# EAGLE board M7065X (EAGLE 6.6.0)
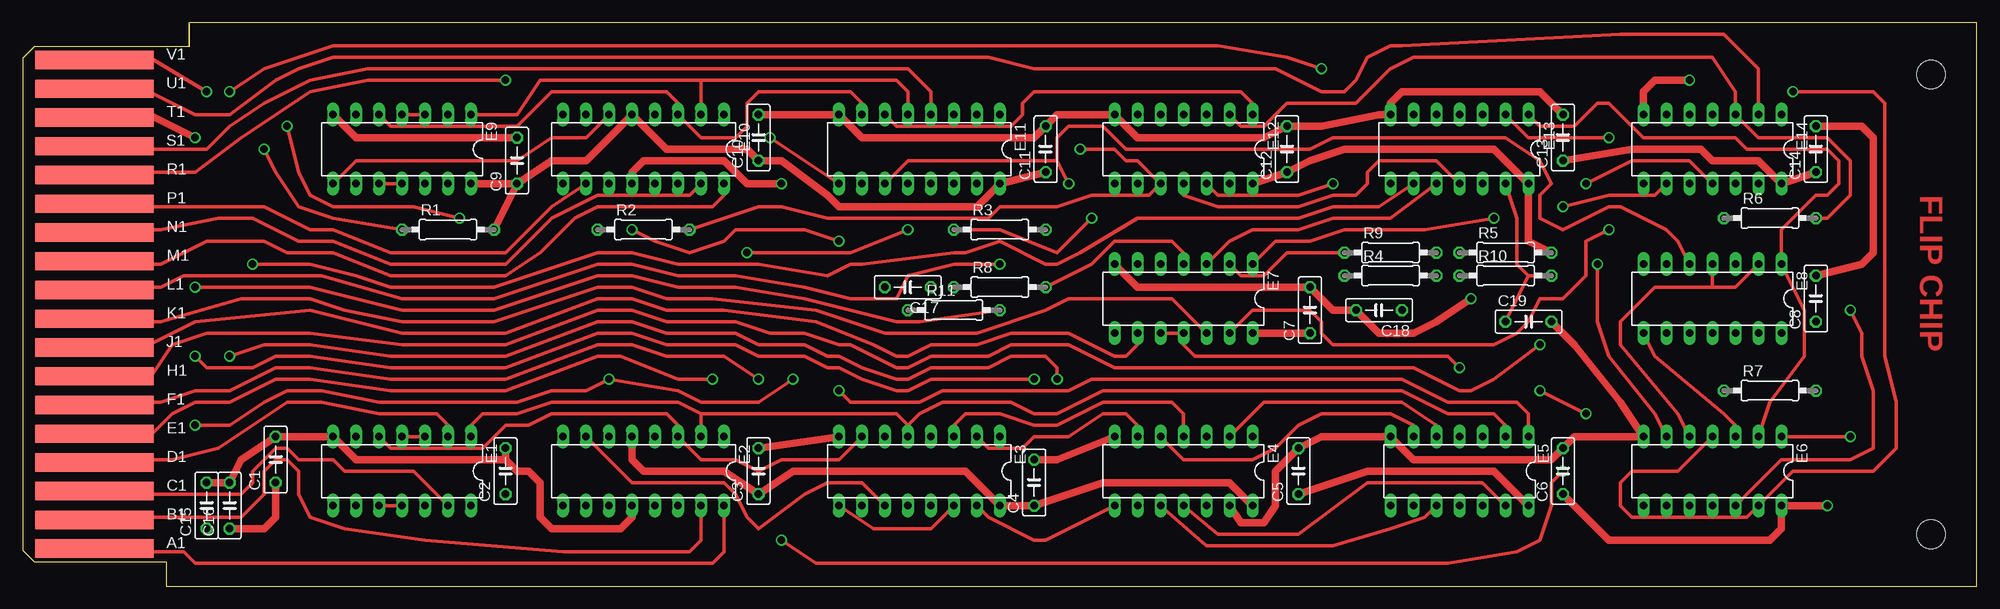
[diagram p0: board, top side]
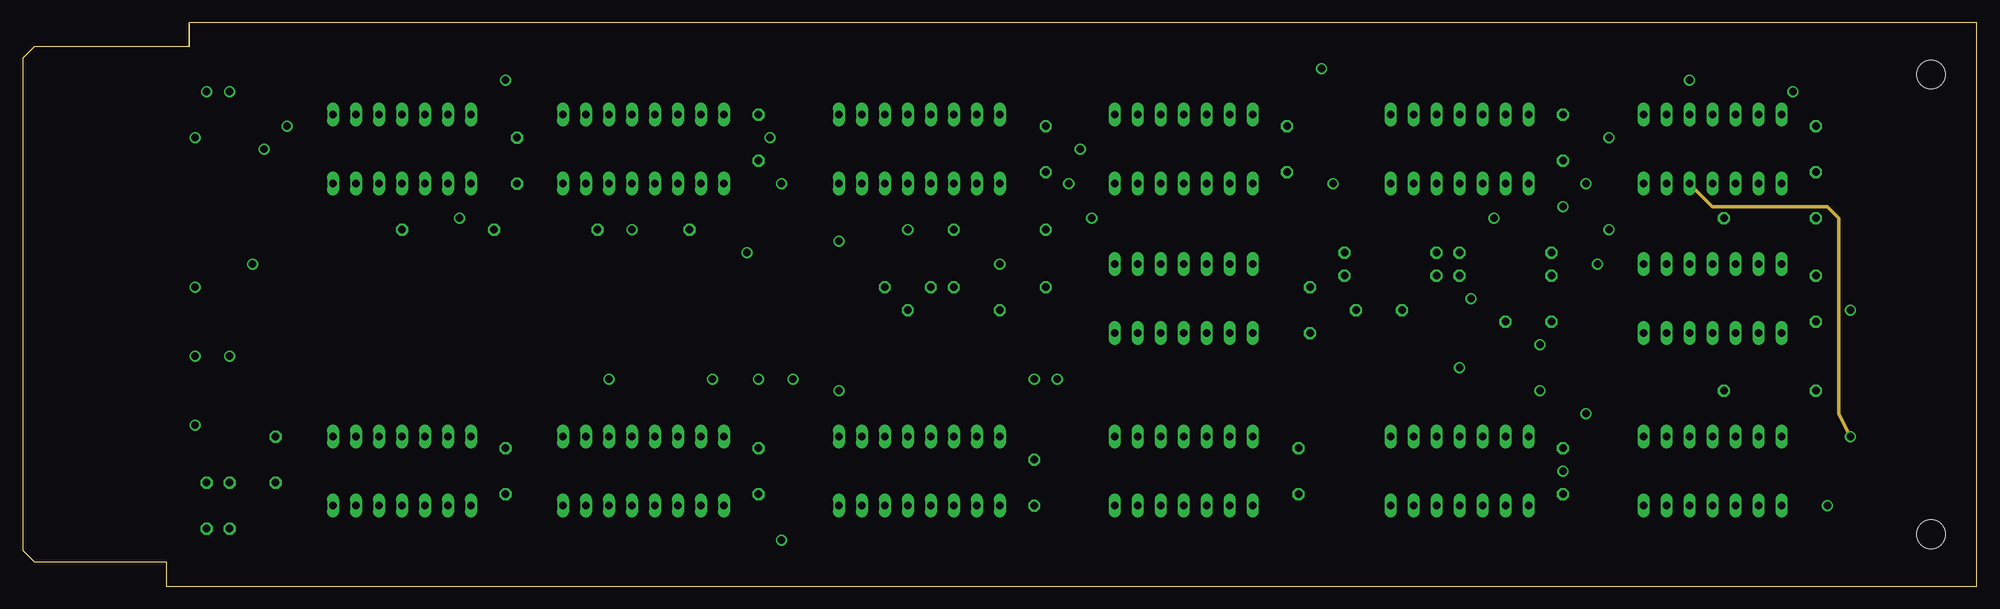
[diagram p1: board, inner layer ECO]
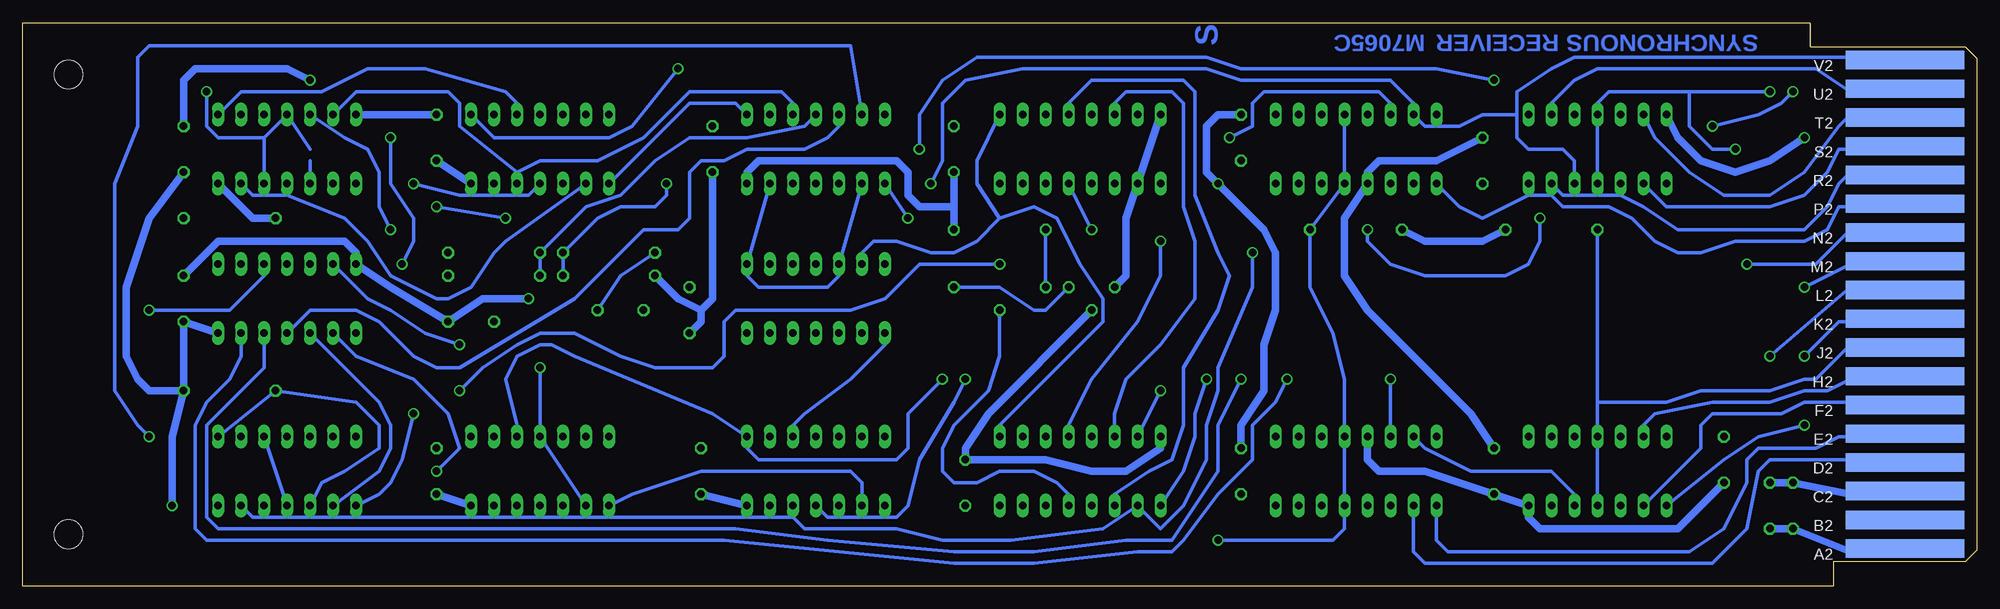
[diagram p2: board, bottom side, seen from below]

Size 215.9 x 62.23 mm. Coordinates in mm from the lower left corner, seen from the top.
Copper layers (1+2+16): Top 0.035mm / dielectric 1.5mm / ECO 0.035mm / dielectric 0.15mm / Bottom 0.035mm
Design rules "16mils *": minimum track width 16mil, minimum drill 32mil, track to track 15mil, track to pad 10mil, pad to pad 10mil, via to via 10mil, smd to smd 10mil, copper to edge 13mil, drill to drill 10mil, minimum pad ring 10mil, minimum via ring 8mil, stop-mask expansion 0mil, vias tented up to drill 0mil, thermal gap 10mil
Net classes: 1 supply: width 0.813 mm

## Footprints (pad centres in the part's own frame; a part is rotated, then mirrored left to right if it is on the bottom)
C050-025X075 = drill 0.813 octagon: 1 -2.54,0; 2 2.54,0
DIL14 = drill 0.813 long: 1 -7.62,-3.81; 2 -5.08,-3.81; 3 -2.54,-3.81; 4 0,-3.81; 5 2.54,-3.81; 6 5.08,-3.81; 7 7.62,-3.81; 8 7.62,3.81; 9 5.08,3.81; 10 2.54,3.81; 11 0,3.81; 12 -2.54,3.81; 13 -5.08,3.81; 14 -7.62,3.81
DIL16 = drill 0.813 long: 1 -8.89,-3.81; 2 -6.35,-3.81; 3 -3.81,-3.81; 4 -1.27,-3.81; 5 1.27,-3.81; 6 3.81,-3.81; 7 6.35,-3.81; 8 8.89,-3.81; 9 8.89,3.81; 10 6.35,3.81; 11 3.81,3.81; 12 1.27,3.81; 13 -1.27,3.81; 14 -3.81,3.81; 15 -6.35,3.81; 16 -8.89,3.81
0207/10 = drill 0.813 octagon: 1 -5.08,0; 2 5.08,0
SINGLE-LONG = hole 3.175: 210.82,56.515; 210.82,5.715
EDGE-CON2 = smd 13.106 x 2.032: A1 7.938,4.128; B1 7.938,7.303; C1 7.938,10.477; D1 7.938,13.652; E1 7.938,16.828; F1 7.938,20.003; H1 7.938,23.177; J1 7.938,26.352; K1 7.938,29.527; L1 7.938,32.703; M1 7.938,35.877; N1 7.938,39.053; P1 7.938,42.227; R1 7.938,45.403; S1 7.938,48.578; T1 7.938,51.752; U1 7.938,54.928; V1 7.938,58.102 | smd 13.106 x 2.032 bottom: A2 7.938,4.128; B2 7.938,7.303; C2 7.938,10.477; D2 7.938,13.652; E2 7.938,16.828; F2 7.938,20.003; H2 7.938,23.177; J2 7.938,26.352; K2 7.938,29.527; L2 7.938,32.703; M2 7.938,35.877; N2 7.938,39.053; P2 7.938,42.227; R2 7.938,45.403; S2 7.938,48.578; T2 7.938,51.752; U2 7.938,54.928; V2 7.938,58.102

## Placement (x,y rotation side)
C1  .01uF  [C050-025X075]  27.94,13.97 90 top
C2  .01uF  [C050-025X075]  53.34,12.7 90 top
C3  .01uF  [C050-025X075]  81.28,12.7 90 top
C4  .01uF  [C050-025X075]  111.76,11.43 90 top
C5  .01uF  [C050-025X075]  140.97,12.7 90 top
C6  .01uF  [C050-025X075]  170.18,12.7 90 top
C7  .01uF  [C050-025X075]  142.24,30.48 90 top
C8  .01uF  [C050-025X075]  198.12,31.75 90 top
C9  .01uF  [C050-025X075]  54.61,46.99 90 top
C10  .01uF  [C050-025X075]  81.28,49.53 90 top
C11  .01uF  [C050-025X075]  113.03,48.26 90 top
C12  .01uF  [C050-025X075]  139.7,48.26 90 top
C13  .01uF  [C050-025X075]  170.18,49.53 90 top
C14  .01uF  [C050-025X075]  198.12,48.26 90 top
C15  .01uF  [C050-025X075]  20.32,8.89 90 top
C16  .01uF  [C050-025X075]  22.86,8.89 90 top
C17  1000pF  [C050-025X075]  97.79,33.02 180 top
C18  1000pF  [C050-025X075]  149.86,30.48 180 top
C19  1000pF  [C050-025X075]  166.37,29.21 0 top
E1  DEC8242  [DIL14]  41.91,12.7 180 top
E2  7475N  [DIL16]  68.58,12.7 180 top
E3  DEC8271  [DIL16]  99.06,12.7 180 top
E4  7404N  [DIL14]  128.27,12.7 180 top
E5  7450N  [DIL14]  158.75,12.7 180 top
E6  7474N  [DIL14]  186.69,12.7 180 top
E7  7400N  [DIL14]  128.27,31.75 180 top
E8  7400N  [DIL14]  186.69,31.75 180 top
E9  DEC8242  [DIL14]  41.91,48.26 180 top
E10  7475N  [DIL16]  68.58,48.26 180 top
E11  DEC8271  [DIL16]  99.06,48.26 180 top
E12  7416N  [DIL14]  128.27,48.26 180 top
E13  7400N  [DIL14]  158.75,48.26 180 top
E14  7474N  [DIL14]  186.69,48.26 180 top
R1  750  [0207/10]  46.99,39.37 0 top
R2  750  [0207/10]  68.58,39.37 0 top
R3  750  [0207/10]  107.95,39.37 0 top
R4  750  [0207/10]  151.13,34.29 0 top
R5  750  [0207/10]  163.83,36.83 0 top
R6  750  [0207/10]  193.04,40.64 0 top
R7  750  [0207/10]  193.04,21.59 0 top
R8  220  [0207/10]  107.95,33.02 0 top
R9  220  [0207/10]  151.13,36.83 0 top
R10  220  [0207/10]  163.83,34.29 0 top
R11  330  [0207/10]  102.87,30.48 0 top
U$1  OUTLINE-SINGLE-LONG  [SINGLE-LONG]  0,0 0 top
U$2  [EDGE-CON2]  0,0 0 top

## Library data of the parts
C1-C19 R1-R11 = rcl
E1 E2 E4 E6-E10 E12-E14 = 74xx-us
E3 E5 E11 U$1 U$2 = dec-con

## Nets
A1: E2.16 U$2.A1
B1: E2.15 U$2.B1
C1: E1.13 U$2.C1
D1: E1.2 U$2.D1
D2: E2.10 U$2.D2
E1: E8.13 U$2.E1
E2: E2.9 U$2.E2
F1: E8.12 U$2.F1
F2: E1.9 U$2.F2
GND [supply]: C1.2 C2.2 C3.2 C4.2 C5.2 C6.2 C7.2 C8.2 C9.2 C10.2 C11.2 C12.2 C13.2 C14.2 C15.2 C16.2 C17.2 C18.2 C19.2 E1.7 E2.12 E3.8 E4.7 E4.13 E5.7 E6.7 E7.7 E8.7 E9.7 E10.12 E11.8 E11.10 E12.7 E13.7 E14.7 R11.1 U$2.C2 U$2.T1
H1: E8.6 U$2.H1
H2: E1.6 U$2.H2
J1: E7.9 U$2.J1
J2: E1.3 E1.4 E1.10 E1.11 E6.2 E8.1 E9.3 E9.4 E9.10 E9.11 E13.1 R1.1 U$2.J2
K1: E7.12 U$2.K1
K2: E4.11 E5.13 U$2.K2
L1: E6.8 U$2.L1
L2: E4.1 E5.3 U$2.L2
M1: E10.16 U$2.M1
M2: E3.13 R11.2 U$2.M2
N1: E10.15 U$2.N1
N2: E13.9 E14.13 U$2.N2
N$1: E1.8 E2.6 E3.9 E3.14
N$2: E1.1 E2.2 E3.5 E5.2
N$3: E1.5 E2.3 E3.7 E5.1
N$4: E3.10 E4.12 E6.4 E6.13 E11.13 E14.4 E14.12
N$5: E6.1 E6.10 E12.6 E14.10 R7.1
N$15: C17.1 E7.4 R8.2
N$16: E7.13 E14.5
N$18: C18.1 E7.2 R9.1
N$19: E7.1 E7.5 E12.9 E12.13 E14.9
N$21: E4.3 E7.8
N$22: E7.3 E13.10
N$23: E3.1 E7.6 E11.1
N$24: E5.4 E5.9 E7.10 E7.11
N$27: E6.5 E8.2 E8.4
N$29: E6.9 E8.10
N$33: E6.3 E6.11 E8.8
N$34: E6.12 E8.3
N$36: E8.11 E12.5
N$37: E9.8 E10.6 E11.9
N$38: E9.1 E10.2 E11.5
N$49: E4.9 E5.8
N$51: E4.5 E5.6
N$52: E3.15 E4.8
N$56: E4.2 E5.5
N$58: E4.10 E5.10
N$60: E3.3 E4.4
N$64: E3.2 E4.6
N$71: E12.11 E13.11 E14.11
N$72: E12.3 E13.12 E14.6
N$76: E3.6 E11.6 E12.1 E13.8
N$77: E12.4 R5.1 R10.1
N$78: E12.12 R4.2 R9.2
N$79: E12.8 R3.1 R8.1
N$80: E12.2 E14.3 R6.2
N$88: E6.6 E13.2
N$90: C19.1 E13.13 R10.2
N$92: E13.3 E14.1
N$120: E9.5 E10.3 E11.7
P1: E10.10 U$2.P1
P2: E10.9 U$2.P2
R1: E2.4 E2.13 E8.9 E10.4 E10.13 E12.10 R2.2 U$2.R1
R2: E9.13 U$2.R2
S1: E1.12 E2.7 E3.11 E11.4 U$2.S1
S2: E9.9 U$2.S2
T2: E9.6 U$2.T2
U1: E14.2 U$2.U1
U2: E9.2 U$2.U2
V1: E3.4 U$2.V1
V2: E8.5 E9.12 E10.7 E11.11 U$2.V2
VCC [supply]: C1.1 C2.1 C3.1 C4.1 C5.1 C6.1 C7.1 C8.1 C9.1 C10.1 C11.1 C12.1 C13.1 C14.1 C15.1 C16.1 E1.14 E2.5 E3.16 E4.14 E5.14 E6.14 E7.14 E8.14 E9.14 E10.5 E11.16 E12.14 E13.14 E14.14 R1.2 R2.1 R3.2 R4.1 R5.2 R6.1 R7.2 U$2.A2

## Tracks (layer width: path | path; a pad name or v marks a point on that pad's centre or on a via)
A1
  Top 0.406: U$2.A1 8.89,3.81 17.78,3.81 19.05,2.54 76.2,2.54 77.47,3.81 E2.16
B1
  Top 0.406: U$2.B1 8.89,7.62 24.13,7.62 26.67,10.16 26.67,12.7 27.94,13.97 29.21,13.97 30.48,12.7 30.48,10.16 31.75,7.62 35.56,6.35 44.45,5.08 59.69,3.81 73.66,3.81 74.93,5.08 E2.15
C1
  Top 0.406: U$2.C1 8.89,10.16 24.13,10.16 25.4,11.43 25.4,12.7 27.94,15.24 29.21,15.24 30.48,13.97 34.29,13.97 35.56,12.7 43.18,12.7 E1.13
D1
  Top 0.406: E1.2 46.99,17.78 45.72,19.05 39.37,19.05 33.02,20.32 29.21,20.32 21.59,15.24 16.51,13.97 8.89,13.97 U$2.D1
D2
  Bottom 0.406: U$2.D2 8.89,13.97 22.86,13.97 24.13,12.7 25.4,6.35 29.21,2.54 60.96,2.54 62.23,3.81 E2.10
E1  (via drill 0.81)
  Top 0.406: v76.2,22.86 72.39,22.86 66.04,25.4 63.5,25.4 53.34,21.59 40.64,21.59 31.75,22.86 27.94,22.86 22.86,20.32 19.05,20.32 16.51,19.05 13.97,16.51 8.89,16.51 U$2.E1
  Bottom 0.406: E8.13 191.77,25.4 193.04,22.86 195.58,20.32 196.85,17.78 196.85,6.35 195.58,5.08 138.43,5.08 113.03,2.54 104.14,2.54 92.71,3.81 88.9,3.81 87.63,5.08 83.82,10.16 80.01,13.97 80.01,17.78 77.47,20.32 v76.2,22.86
E2
  Bottom 0.406: E2.9 59.69,5.08 58.42,3.81 31.75,3.81 27.94,6.35 25.4,11.43 25.4,13.97 24.13,15.24 17.78,15.24 15.24,16.51 8.89,16.51 U$2.E2
F1  (via drill 0.81)
  Top 0.406: v81.28,22.86 77.47,25.4 71.12,25.4 67.31,26.67 63.5,26.67 53.34,22.86 40.64,22.86 31.75,24.13 27.94,24.13 22.86,21.59 19.05,21.59 15.24,20.32 8.89,20.32 U$2.F1
  Bottom 0.406: v81.28,22.86 83.82,17.78 83.82,12.7 88.9,5.08 93.98,5.08 104.14,3.81 113.03,3.81 127,5.08 137.16,6.35 194.31,6.35 195.58,7.62 195.58,17.78 189.23,24.13 E8.12
F2
  Bottom 0.406: E1.9 30.48,15.24 30.48,17.78 29.21,19.05 21.59,19.05 19.05,20.32 8.89,20.32 U$2.F2
GND  (via drill 0.81)
  Top 0.813: C15.2 C16.2 24.13,13.97 C1.2 E1.7 36.83,13.97 53.34,13.97 | E2.12 67.31,7.62 66.04,6.35 58.42,6.35 57.15,7.62 57.15,11.43 55.88,12.7 54.61,12.7 53.34,13.97 | C19.2 171.45,26.67 176.53,20.32 E6.7 171.45,16.51 C6.2 168.91,13.97 153.67,13.97 E5.7 143.51,16.51 C5.2 138.43,12.7 138.43,8.89 137.16,6.99 134.62,6.99 E4.13 | v160.02,31.75 156.21,29.21 153.67,27.94 149.86,27.94 C18.2 144.78,30.48 C7.2 123.19,33.02 E7.7 | C14.2 203.2,50.8 204.47,49.53 204.47,36.83 203.2,35.56 C8.2 | U$2.T1 8.89,52.07 13.97,52.07 v19.05,49.53 | C10.2 E11.8 92.71,49.53 111.76,49.53 C11.2 114.3,52.07 E12.7 123.19,49.53 137.16,49.53 C12.2 143.51,50.8 149.86,52.07 E13.7 151.13,53.34 152.4,54.61 167.64,54.61 C13.2 | E14.7 179.07,54.61 180.34,55.88 v184.15,55.88 | v83.82,44.45 80.01,44.45 77.47,46.99 68.58,46.99 67.31,45.72 E10.12 | E9.7 36.83,49.53 C9.2 | E4.7 114.3,13.97 C4.2 | C3.2 E3.8 | 53.34,13.97 C2.2
  Bottom 0.813: U$2.C2 8.89,10.16 13.97,10.16 C15.2 C16.2 | C2.2 55.88,19.05 67.31,30.48 69.85,34.29 69.85,40.64 E10.12 67.31,45.72 66.04,46.99 59.69,46.99 C9.2 | E9.7 33.02,49.53 30.48,46.99 26.67,45.72 22.86,46.99 v19.05,49.53 | C3.2 81.28,17.78 78.74,21.59 78.74,26.67 77.47,30.48 77.47,36.83 78.74,39.37 v83.82,44.45 85.09,45.72 85.09,50.8 83.82,52.07 C10.2 | E3.8 90.17,15.24 93.98,12.7 97.79,12.7 102.87,13.97 C4.2 111.76,15.24 109.22,19.05 R11.1 | E11.8 E11.10 93.98,40.64 93.98,34.29 C17.2 | C14.2 198.12,55.88 196.85,57.15 186.69,57.15 v184.15,55.88 | C13.2 E14.7 | C8.2 194.31,38.1 180.34,38.1 179.07,36.83 E8.7 175.26,33.02 C19.2 165.1,31.75 v160.02,31.75
H1  (via drill 0.81)
  Top 0.406: v167.64,26.67 162.56,22.86 160.02,21.59 158.75,21.59 153.67,24.13 120.65,24.13 115.57,26.67 109.22,26.67 106.68,25.4 100.33,25.4 97.79,24.13 96.52,24.13 91.44,26.67 90.17,26.67 86.36,27.94 82.55,27.94 78.74,29.21 71.12,29.21 67.31,30.48 63.5,30.48 53.34,26.67 41.91,26.67 31.75,27.94 20.32,27.94 16.51,26.67 13.97,22.86 8.89,22.86 U$2.H1
  Bottom 0.406: E8.6 177.8,31.75 175.26,30.48 171.45,27.94 v167.64,26.67
H2
  Bottom 0.406: E1.6 36.83,17.78 35.56,19.05 29.21,20.32 22.86,20.32 19.05,21.59 16.51,21.59 13.97,22.86 8.89,22.86 U$2.H2
J1
  Top 0.406: E7.9 123.19,26.67 121.92,25.4 120.65,25.4 115.57,27.94 109.22,27.94 105.41,26.67 100.33,26.67 97.79,25.4 96.52,25.4 93.98,26.67 87.63,29.21 77.47,30.48 71.12,30.48 67.31,31.75 63.5,31.75 53.34,27.94 52.07,27.94 41.91,27.94 31.75,30.48 19.05,29.21 13.97,26.67 7.62,26.67 U$2.J1
J2  (via drill 0.81)
  Top 0.406: E1.4 E1.3 | E1.11 E1.10 | v26.67,48.26 27.94,45.72 30.48,41.91 34.29,40.64 R1.1 | v22.86,54.61 26.67,57.15 34.29,59.69 132.08,59.69 139.7,58.42 v143.51,57.15 | E9.11 E9.10 | E9.4 E9.3 | E13.1 167.64,50.8 171.45,50.8 173.99,53.34 175.26,53.34 179.07,49.53 189.23,49.53 190.5,48.26 199.39,48.26 200.66,46.99 200.66,44.45 199.39,43.18 198.12,43.18 194.31,39.37 E8.1 196.85,30.48 196.85,25.4 193.04,20.32 E6.2
  Bottom 0.406: E1.11 E1.4 41.91,20.32 | 41.91,20.32 R1.1 | 41.91,20.32 34.29,20.32 30.48,21.59 22.86,21.59 19.05,22.86 17.78,22.86 13.97,26.67 8.89,26.67 U$2.J2 | E9.11 E9.4 41.91,53.34 40.64,54.61 31.75,54.61 | 31.75,54.61 v22.86,54.61 | 31.75,54.61 31.75,50.8 29.21,48.26 v26.67,48.26 | E13.1 163.83,49.53 151.13,49.53 148.59,50.8 v143.51,57.15
K1
  Top 0.406: U$2.K1 8.89,29.21 15.24,29.21 24.13,31.75 31.75,31.75 35.56,30.48 41.91,29.21 52.07,29.21 63.5,33.02 67.31,33.02 71.12,31.75 76.2,31.75 87.63,30.48 95.25,27.94 105.41,27.94 113.03,30.48 115.57,31.75 127,31.75 E7.12
K2  (via drill 0.81)
  Top 0.406: E4.11 132.08,5.71 140.97,5.71 148.59,11.43 161.29,11.43 E5.13 | v111.76,22.86 100.33,22.86 97.79,21.59 96.52,21.59 92.71,22.86 90.17,24.13 88.9,24.13 86.36,25.4 81.28,25.4 78.74,26.67 71.12,26.67 67.31,27.94 63.5,27.94 53.34,24.13 40.64,24.13 31.75,25.4 27.94,25.4 25.4,24.13 20.32,24.13 v19.05,25.4
  Bottom 0.406: U$2.K2 8.89,29.21 15.24,29.21 v19.05,25.4 | E4.11 127,7.62 119.38,7.62 118.11,8.89 116.84,13.97 113.03,20.32 v111.76,22.86
L1  (via drill 0.81)
  Top 0.406: U$2.L1 8.89,33.02 15.24,33.02 17.78,34.29 33.02,34.29 41.91,31.75 52.07,31.75 63.5,35.56 67.31,35.56 72.39,34.29 78.74,34.29 86.36,33.02 91.44,31.75 96.52,31.75 97.79,34.29 102.87,35.56 v107.95,35.56 | v172.72,19.05 v167.64,21.59
  Bottom 0.406: E6.8 176.53,10.16 175.26,11.43 173.99,13.97 v172.72,19.05 | v167.64,21.59 165.1,24.13 161.29,26.67 158.75,27.94 154.94,27.94 149.86,25.4 146.05,24.13 139.7,24.13 138.43,25.4 138.43,29.21 137.16,30.48 124.46,30.48 120.65,31.75 116.84,35.56 v107.95,35.56
L2  (via drill 0.81)
  Top 0.406: v114.3,22.86 114.3,24.13 113.03,25.4 109.22,25.4 106.68,24.13 100.33,24.13 97.79,22.86 96.52,22.86 92.71,24.13 90.17,25.4 88.9,25.4 86.36,26.67 81.28,26.67 78.74,27.94 71.12,27.94 67.31,29.21 63.5,29.21 53.34,25.4 40.64,25.4 31.75,26.67 26.67,26.67 v22.86,25.4
  Bottom 0.406: U$2.L2 8.89,33.02 13.97,33.02 v22.86,25.4 | v114.3,22.86 118.11,19.05 118.11,15.24 119.38,13.97 134.62,13.97 135.89,15.24 E4.1 139.7,19.05 154.94,25.4 157.48,26.67 158.75,26.67 161.29,25.4 162.56,22.86 161.29,17.78 E5.3
M1
  Top 0.406: E10.16 77.47,43.18 76.2,41.91 63.5,41.91 60.96,40.64 57.15,36.83 53.34,34.29 40.64,34.29 34.29,36.83 29.21,36.83 26.67,38.1 20.32,38.1 15.24,35.56 8.89,35.56 U$2.M1
M2  (via drill 0.81)
  Top 0.406: R11.2 99.06,29.21 96.52,29.21 86.36,31.75 78.74,33.02 72.39,33.02 67.31,34.29 63.5,34.29 52.07,30.48 41.91,30.48 31.75,33.02 v19.05,33.02
  Bottom 0.406: U$2.M2 8.89,35.56 13.97,35.56 v19.05,33.02 | E3.13 100.33,10.16 101.6,11.43 104.14,12.7 107.95,12.7 110.49,11.43 113.03,11.43 114.3,12.7 114.3,15.24 113.03,17.78 109.22,21.59 107.95,25.4 R11.2
N1
  Top 0.406: E10.15 73.66,43.18 63.5,43.18 58.42,40.64 53.34,35.56 40.64,35.56 34.29,38.1 30.48,38.1 25.4,40.64 21.59,40.64 15.24,39.37 8.89,39.37 U$2.N1
N2  (via drill 0.81)
  Top 0.406: v25.4,35.56 31.75,35.56 36.83,34.29 40.64,33.02 52.07,33.02 63.5,36.83 67.31,36.83 72.39,35.56 81.28,35.56 88.9,34.29 91.44,35.56 92.71,35.56 102.87,36.83 104.14,36.83 107.95,38.1 113.03,35.56 114.3,35.56 116.84,36.83 123.19,40.64 140.97,40.64 144.78,41.91 149.86,41.91 E13.9
  Bottom 0.406: U$2.N2 8.89,39.37 13.97,39.37 17.78,35.56 v25.4,35.56 | E14.13 190.5,43.18 186.69,43.18 180.34,40.64 177.8,38.1 175.26,34.29 170.18,31.75 168.91,31.75 166.37,33.02 163.83,36.83 162.56,38.1 E13.9
N$1  (via drill 0.81)
  Top 0.406: E3.9 93.98,6.35 100.33,6.35 E3.14 | v85.09,22.86 81.28,20.32 74.93,20.32 72.39,21.59 v64.77,22.86 62.23,21.59 58.42,21.59 54.61,20.32 39.37,20.32 33.02,21.59 29.21,21.59 26.67,20.32 22.86,17.78 v19.05,17.78
  Bottom 0.406: v19.05,17.78 24.13,16.51 27.94,13.97 E1.8 | E2.6 v64.77,22.86 | E3.9 87.63,12.7 86.36,16.51 86.36,19.05 v85.09,22.86
N$2
  Top 0.406: 74.93,19.05 72.39,20.32 58.42,20.32 54.61,19.05 50.8,19.05 49.53,17.78 E1.1 | 74.93,19.05 E2.2 | 74.93,19.05 96.52,19.05 97.79,17.78 | 97.79,17.78 E3.5 | 97.79,17.78 99.06,19.05 101.6,20.32 109.22,20.32 111.76,19.05 114.3,19.05 119.38,21.59 152.4,21.59 157.48,19.05 162.56,19.05 163.83,17.78 E5.2
N$3  (via drill 0.81)
  Top 0.406: E5.1 166.37,19.05 165.1,20.32 157.48,20.32 152.4,22.86 118.11,22.86 115.57,21.59 101.6,21.59 99.06,20.32 91.44,20.32 v90.17,21.59 | E3.7 90.17,13.97 83.82,13.97 81.28,12.7 78.74,13.97 74.93,13.97 E2.3 72.39,17.78 71.12,19.05 58.42,19.05 55.88,17.78 53.34,17.78 50.8,15.24 40.64,15.24 E1.5
  Bottom 0.406: E3.7 v90.17,21.59
N$4  (via drill 0.81)
  Top 0.406: v195.58,54.61 204.47,54.61 205.74,53.34 205.74,25.4 207.01,20.32 207.01,15.24 204.47,12.7 195.58,12.7 E6.13 190.5,7.62 177.8,7.62 176.53,8.89 176.53,11.43 177.8,12.7 182.88,12.7 E6.4 | v80.01,36.83 91.44,36.83 v97.79,39.37
  Bottom 0.406: 184.15,48.26 E14.4 189.23,49.53 | 189.23,49.53 E14.12 | 189.23,49.53 194.31,49.53 195.58,50.8 v195.58,54.61 | v80.01,36.83 80.01,33.02 83.82,24.13 83.82,21.59 85.09,17.78 85.09,13.97 87.63,8.89 90.17,6.35 E3.10 96.52,6.35 106.68,5.08 114.3,5.08 119.38,6.35 129.54,6.35 130.81,7.62 | 130.81,7.62 E4.12 | 130.81,7.62 190.5,7.62 E6.13 | E11.13 v97.79,39.37
N$5  (via drill 0.81)
  Top 0.406: E6.1 v201.93,16.51
  ECO 0.406: v201.93,16.51 200.66,19.05 200.66,40.64 199.39,41.91 186.69,41.91 E14.10
  Bottom 0.406: v201.93,16.51 203.2,17.78 205.74,21.59 205.74,44.45 203.2,50.8 203.2,58.42 201.93,59.69 124.46,59.69 E12.6 | E6.10 182.88,11.43 180.34,12.7 176.53,15.24 176.53,17.78 179.07,20.32 R7.1 E6.1 | E14.10 184.15,46.99
N$15
  Top 0.406: E7.4 128.27,36.83 127,38.1 120.65,38.1 118.11,35.56 R8.2
  Bottom 0.406: R8.2 107.95,33.02 104.14,30.48 102.87,30.48 C17.1
N$16  (via drill 0.81)
  Top 0.406: v175.26,39.37 172.72,38.1 172.72,34.29 170.18,31.75 167.64,31.75 166.37,29.21 165.1,27.94 162.56,26.67 144.78,26.67 143.51,27.94 143.51,29.21 142.24,30.48 135.89,30.48 E7.13
  Bottom 0.406: E14.5 180.34,49.53 177.8,48.26 176.53,45.72 176.53,41.91 v175.26,39.37
N$18
  Top 0.406: R9.1 139.7,36.83 137.16,34.29 134.62,34.29 E7.2
  Bottom 0.406: R9.1 149.86,34.29 C18.1
N$19  (via drill 0.81)
  Top 0.406: E7.1 138.43,38.1 142.24,38.1 146.05,39.37 154.94,39.37 v162.56,40.64 | v170.18,41.91 175.26,43.18 180.34,43.18 E14.9
  Bottom 0.406: E12.13 E7.1 135.89,34.29 134.62,33.02 127,33.02 125.73,34.29 E7.5 E12.9 | v162.56,40.64 v170.18,41.91
N$21
  Bottom 0.406: E7.8 120.65,26.67 124.46,22.86 129.54,19.05 130.81,17.78 E4.3
N$22
  Top 0.406: E13.10 151.13,40.64 144.78,40.64 140.97,39.37 135.89,39.37 133.35,38.1 E7.3
N$23
  Bottom 0.406: E7.6 123.19,36.83 121.92,38.1 119.38,38.1 115.57,36.83 113.03,36.83 110.49,38.1 107.95,40.64 | E3.1 107.95,17.78 96.52,29.21 96.52,31.75 99.06,35.56 101.6,40.64 104.14,41.91 107.95,40.64 | 107.95,40.64 110.49,44.45 110.49,46.99 E11.1
N$24  (via drill 0.81)
  Top 0.406: v158.75,24.13 157.48,25.4 129.54,25.4 128.27,26.67 E7.11 E7.10
  Bottom 0.406: E5.9 E5.4 v158.75,24.13
N$27
  Top 0.406: E6.5 182.88,19.05 176.53,26.67 176.53,29.21 180.34,33.02 186.69,33.02 | E8.2 189.23,33.02 186.69,33.02 | 186.69,33.02 E8.4
N$29
  Bottom 0.406: E8.10 176.53,20.32 175.26,17.78 175.26,15.24 176.53,12.7 E6.9
N$33
  Top 0.406: E8.8 180.34,25.4 187.96,19.05 189.23,17.78 E6.3
  Bottom 0.406: E6.11 E6.3
N$34  (via drill 0.81)
  Top 0.406: v201.93,30.48 203.2,27.94 203.2,25.4 204.47,21.59 204.47,15.24 201.93,13.97 194.31,13.97 E6.12
  Bottom 0.406: E8.3 189.23,34.29 193.04,30.48 v201.93,30.48
N$36
  Bottom 0.406: E8.11 184.15,30.48 179.07,30.48 176.53,29.21 172.72,25.4 170.18,24.13 167.64,24.13 154.94,31.75 147.32,39.37 143.51,39.37 142.24,40.64 142.24,45.72 140.97,46.99 138.43,46.99 135.89,48.26 129.54,48.26 127,49.53 125.73,50.8 E12.5
N$37  (via drill 0.81)
  Top 0.406: E9.8 36.83,46.99 54.61,46.99 58.42,49.53 62.23,49.53 E10.6 | E11.9 v82.55,49.53
  Bottom 0.406: E10.6 64.77,53.34 66.04,54.61 78.74,54.61 80.01,53.34 80.01,50.8 v82.55,49.53
N$38
  Top 0.406: E11.5 97.79,54.61 96.52,55.88 74.93,55.88 | 74.93,55.88 E10.2 | 74.93,55.88 57.15,55.88 54.61,52.07 E9.1
N$49
  Bottom 0.406: E4.9 123.19,11.43 124.46,12.7 140.97,12.7 148.59,10.16 E5.8
N$51
  Top 0.406: E4.5 128.27,13.97 135.89,13.97 138.43,15.24 140.97,17.78 143.51,19.05 151.13,19.05 153.67,17.78 E5.6
N$52
  Top 0.406: E3.15 106.68,7.62 111.76,5.08 113.03,5.08 E4.8
N$56
  Top 0.406: E5.5 156.21,17.78 152.4,20.32 137.16,20.32 E4.2
N$58
  Top 0.406: E4.10 130.81,4.45 144.78,4.45 151.13,6.35 154.94,7.62 E5.10
N$60
  Top 0.406: E3.3 102.87,17.78 104.14,19.05 107.95,19.05 111.76,17.78 114.3,17.78 119.38,20.32 127,20.32 128.27,19.05 E4.4
N$64
  Top 0.406: E4.6 123.19,17.78 121.92,19.05 119.38,19.05 115.57,16.51 111.76,16.51 110.49,15.24 106.68,15.24 E3.2
N$71  (via drill 0.81)
  Top 0.406: E12.11 128.27,43.18 132.08,41.91 140.97,41.91 144.78,43.18 147.32,43.18 148.59,44.45 148.59,45.72 149.86,46.99 156.21,46.99 E13.11 | v172.72,44.45 177.8,46.99 184.15,46.99 E14.11
  Bottom 0.406: E13.11 160.02,43.18 167.64,43.18 v172.72,44.45
N$72
  Bottom 0.406: E14.6 179.07,54.61 168.91,54.61 167.64,53.34 167.64,50.8 161.29,45.72 | E13.12 161.29,45.72 | 161.29,45.72 158.75,46.99 152.4,46.99 147.32,49.53 142.24,54.61 132.08,54.61 130.81,53.34 E12.3
N$76
  Top 0.406: E12.1 135.89,53.34 134.62,54.61 111.76,54.61 110.49,53.34 110.49,52.07 109.22,50.8 96.52,50.8 E11.6
  Bottom 0.406: E11.6 95.25,53.34 93.98,54.61 88.9,54.61 87.63,53.34 87.63,41.91 86.36,38.1 86.36,31.75 90.17,26.67 93.98,22.86 95.25,19.05 E3.6 | E12.1 137.16,53.34 142.24,53.34 E13.8
N$77
  Bottom 0.406: E12.4 129.54,50.8 135.89,49.53 142.24,49.53 146.05,46.99 149.86,43.18 153.67,41.91 R5.1 R10.1
N$78  (via drill 0.81)
  Top 0.406: E12.12 132.08,43.18 140.97,43.18 v144.78,44.45
  Bottom 0.406: R4.2 R9.2 152.4,40.64 149.86,41.91 146.05,41.91 144.78,43.18 v144.78,44.45
N$79  (via drill 0.81)
  Top 0.406: v118.11,40.64 114.3,36.83 107.95,39.37 R3.1
  Bottom 0.406: E12.8 v118.11,40.64 | R8.1 R3.1
N$80
  Top 0.406: R6.2 199.39,40.64 201.93,43.18 201.93,46.99 199.39,49.53 191.77,49.53 E14.3 189.23,54.61 186.69,58.42 153.67,58.42 151.13,57.15 147.32,53.34 139.7,53.34 137.16,50.8 134.62,50.8 E12.2
N$88  (via drill 0.81)
  Top 0.406: E6.6 180.34,19.05 175.26,25.4 173.99,29.21 v173.99,35.56 | v175.26,49.53 166.37,49.53 E13.2
  Bottom 0.406: v173.99,35.56 172.72,38.1 172.72,40.64 175.26,44.45 v175.26,49.53
N$90
  Top 0.406: E13.13 165.1,40.64 165.1,36.83 165.1,35.56 166.37,34.29 | R10.2 166.37,34.29 | 166.37,34.29 C19.1
N$92
  Bottom 0.406: E14.1 191.77,54.61 182.88,54.61 177.8,57.15 171.45,57.15 162.56,54.61 161.29,53.34 E13.3
N$120
  Top 0.406: E9.5 40.64,50.8 54.61,50.8 58.42,54.61 71.12,54.61 72.39,53.34 E10.3 74.93,49.53 78.74,49.53 80.01,50.8 80.01,53.34 81.28,54.61 91.44,54.61 92.71,53.34 E11.7
P1
  Top 0.406: E10.10 58.42,41.91 53.34,36.83 40.64,36.83 34.29,39.37 31.75,39.37 26.67,41.91 8.89,41.91 U$2.P1
P2
  Bottom 0.406: E10.9 57.15,41.91 54.61,40.64 49.53,43.18 46.99,43.18 45.72,41.91 40.64,41.91 38.1,40.64 35.56,38.1 33.02,36.83 30.48,36.83 26.67,38.1 19.05,38.1 16.51,39.37 15.24,41.91 8.89,41.91 U$2.P2
R1  (via drill 0.81)
  Top 0.406: v116.84,48.26 120.65,48.26 121.92,46.99 123.19,46.99 E12.10 124.46,43.18 118.11,43.18 114.3,41.91 107.95,41.91 106.68,40.64 88.9,40.64 83.82,41.91 81.28,41.91 R2.2 | v53.34,55.88 38.1,55.88 31.75,54.61 24.13,49.53 19.05,45.72 8.89,45.72 U$2.R1 | v83.82,5.08 87.63,2.54 157.48,2.54 165.1,3.81 167.64,5.08 168.91,8.89 168.91,11.43 v170.18,12.7
  Bottom 0.406: v116.84,48.26 116.84,52.07 114.3,55.88 110.49,58.42 85.09,58.42 81.28,57.15 59.69,57.15 v53.34,55.88 | E8.9 179.07,25.4 172.72,22.86 168.91,19.05 167.64,15.24 v170.18,12.7 | E10.4 E10.13 R2.2 73.66,33.02 71.12,27.94 69.85,22.86 E2.4 E2.13 69.85,6.35 71.12,5.08 v83.82,5.08
R2
  Bottom 0.406: E9.13 45.72,43.18 39.37,43.18 36.83,41.91 33.02,39.37 19.05,39.37 16.51,41.91 15.24,44.45 13.97,45.72 8.89,45.72 U$2.R2
S1
  Top 0.406: E11.4 100.33,54.61 97.79,57.15 38.1,57.15 31.75,55.88 26.67,53.34 22.86,50.8 20.32,48.26 8.89,48.26 U$2.S1 | E2.7 67.31,11.43 77.47,11.43 78.74,10.16 80.01,7.62 81.28,6.35 86.36,10.16 88.9,11.43 92.71,11.43 E3.11
  Bottom 0.406: E3.11 95.25,10.16 91.44,12.7 88.9,13.97 87.63,17.78 87.63,24.13 83.82,30.48 82.55,34.29 83.82,36.83 86.36,43.18 86.36,54.61 87.63,55.88 97.79,55.88 100.33,53.34 E11.4 | E1.12 44.45,10.16 46.99,12.7 55.88,12.7 60.96,15.24 E2.7
S2
  Bottom 0.406: E9.9 34.29,41.91 22.86,41.91 19.05,43.18 16.51,45.72 15.24,48.26 8.89,48.26 U$2.S2
T2
  Bottom 0.406: E9.6 35.56,49.53 31.75,45.72 27.94,43.18 22.86,43.18 19.05,45.72 15.24,50.8 13.97,52.07 8.89,52.07 U$2.T2
U1
  Top 0.406: E14.2 191.77,57.15 187.96,60.96 176.53,60.96 152.4,59.69 151.13,59.69 148.59,58.42 147.32,55.88 146.05,54.61 143.51,54.61 138.43,57.15 111.76,57.15 106.68,58.42 34.29,58.42 30.48,57.15 27.94,55.88 22.86,52.07 19.05,52.07 13.97,54.61 8.89,54.61 U$2.U1
U2
  Bottom 0.406: E9.2 46.99,53.34 44.45,55.88 41.91,57.15 17.78,57.15 13.97,54.61 8.89,54.61 U$2.U2
V1  (via drill 0.81)
  Top 0.406: U$2.V1 8.89,58.42 13.97,58.42 v20.32,54.61 | v29.21,50.8 30.48,45.72 31.75,43.18 34.29,41.91 43.18,41.91 v48.26,40.64 | v67.31,39.37 69.85,38.1 73.66,36.83 77.47,38.1 78.74,39.37 86.36,39.37 v90.17,38.1
  Bottom 0.406: v20.32,54.61 21.59,53.34 24.13,52.07 v29.21,50.8 | v67.31,39.37 67.31,38.1 64.77,35.56 60.96,34.29 52.07,34.29 49.53,35.56 48.26,38.1 v48.26,40.64 | E3.4 100.33,17.78 97.79,22.86 92.71,29.21 90.17,34.29 v90.17,38.1
V2  (via drill 0.81)
  Top 0.406: v115.57,44.45 114.3,46.99 | 114.3,46.99 114.3,49.53 115.57,50.8 119.38,50.8 121.92,48.26 142.24,48.26 144.78,49.53 163.83,49.53 167.64,46.99 168.91,44.45 167.64,43.18 167.64,40.64 170.18,39.37 175.26,41.91 176.53,41.91 181.61,39.37 182.88,38.1 E8.5 | E11.11 97.79,46.99 114.3,46.99
  Bottom 0.406: E9.12 44.45,46.99 45.72,48.26 49.53,48.26 50.8,49.53 50.8,52.07 | 50.8,52.07 50.8,54.61 46.99,57.15 44.45,58.42 8.89,58.42 U$2.V2 | 50.8,52.07 54.61,52.07 57.15,50.8 60.96,50.8 E10.7 62.23,53.34 64.77,55.88 81.28,55.88 85.09,57.15 105.41,57.15 111.76,55.88 114.3,53.34 114.3,46.99 v115.57,44.45
VCC  (via drill 0.81)
  Top 0.813: C5.1 148.59,12.7 162.56,12.7 E5.14 | v199.39,8.89 E6.14 194.31,6.35 193.04,5.08 175.26,5.08 C6.1 | C13.1 177.8,48.26 185.42,48.26 186.69,46.99 191.77,46.99 E14.14 C14.1 | C11.1 E11.16 105.41,41.91 90.17,41.91 88.9,43.18 83.82,46.99 C10.1 80.01,48.26 71.12,48.26 E10.5 62.23,46.99 58.42,46.99 C9.1 | E12.14 C12.1 142.24,46.99 146.05,48.26 162.56,48.26 E13.14 166.37,38.1 R5.2 | C9.1 R1.2 | C9.1 E9.14 | E4.14 133.35,11.43 119.38,11.43 C4.1 E3.16 104.14,12.7 85.09,12.7 C3.1 77.47,12.7 68.58,12.7 67.31,13.97 E2.5 | C16.1 26.67,6.35 27.94,7.62 C1.1 | E7.14 C7.1
  Bottom 0.813: U$2.A2 8.89,4.13 8.89,3.81 13.97,3.81 C15.1 C16.1 | E2.5 67.31,13.97 66.04,12.7 60.96,12.7 C2.1 E1.14 49.53,7.62 48.26,6.35 33.02,6.35 C1.1 | E8.14 C8.1 R7.2 | R7.2 199.39,16.51 v199.39,8.89 | R7.2 201.93,21.59 203.2,22.86 204.47,25.4 204.47,33.02 201.93,40.64 C14.1 | C7.1 140.97,29.21 140.97,30.48 | 140.97,30.48 143.51,31.75 R4.1 | 140.97,30.48 139.7,31.75 C12.1 | E14.14 190.5,40.64 R6.1 | E13.14 C13.1 | E12.14 135.89,45.72 134.62,46.99 119.38,46.99 118.11,45.72 118.11,43.18 116.84,41.91 113.03,41.91 | 113.03,41.91 C11.1 | 113.03,41.91 R3.2 | E5.14 C6.1 | R1.2 54.61,38.1 60.96,38.1 R2.1 | E4.14 C5.1

## Text on the board
Top: FLIP CHIP
Bottom: SYNCHRONOUS RECEIVER | M7065C | S